# EAGLE board sega (EAGLE 7.7.0)
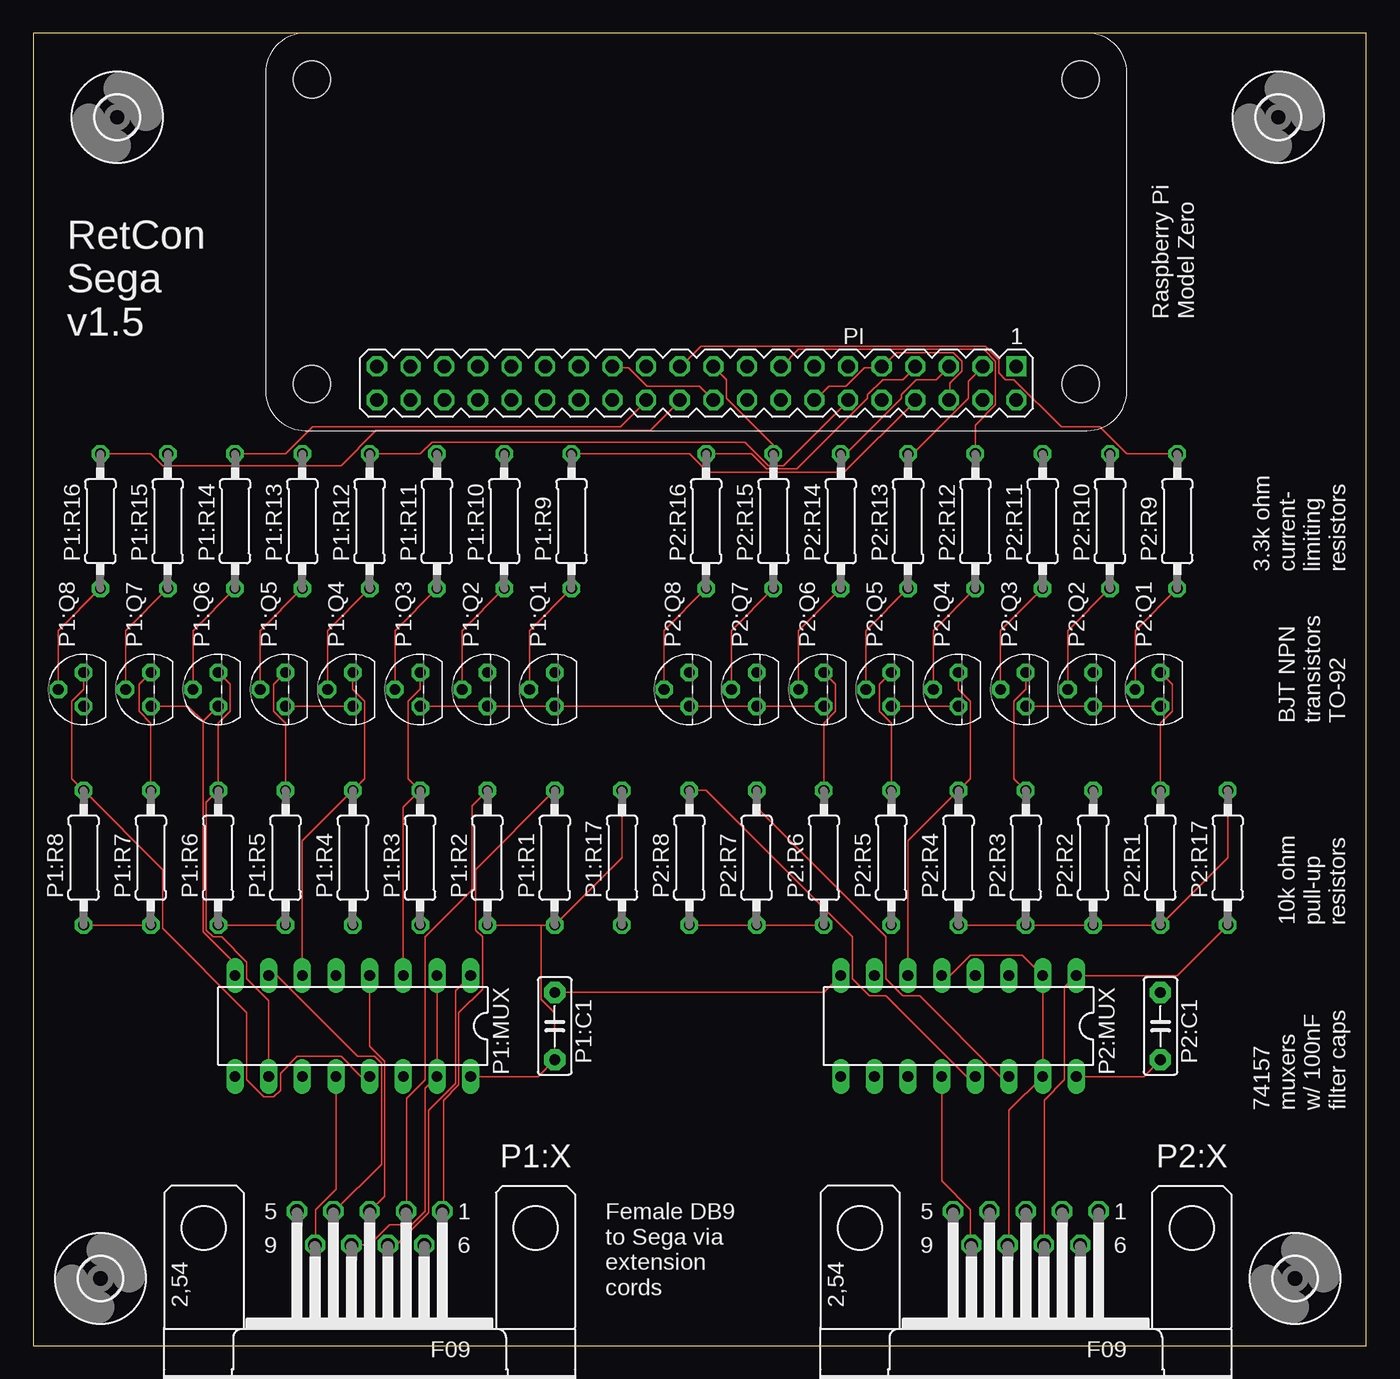
[diagram p0: board, top side]
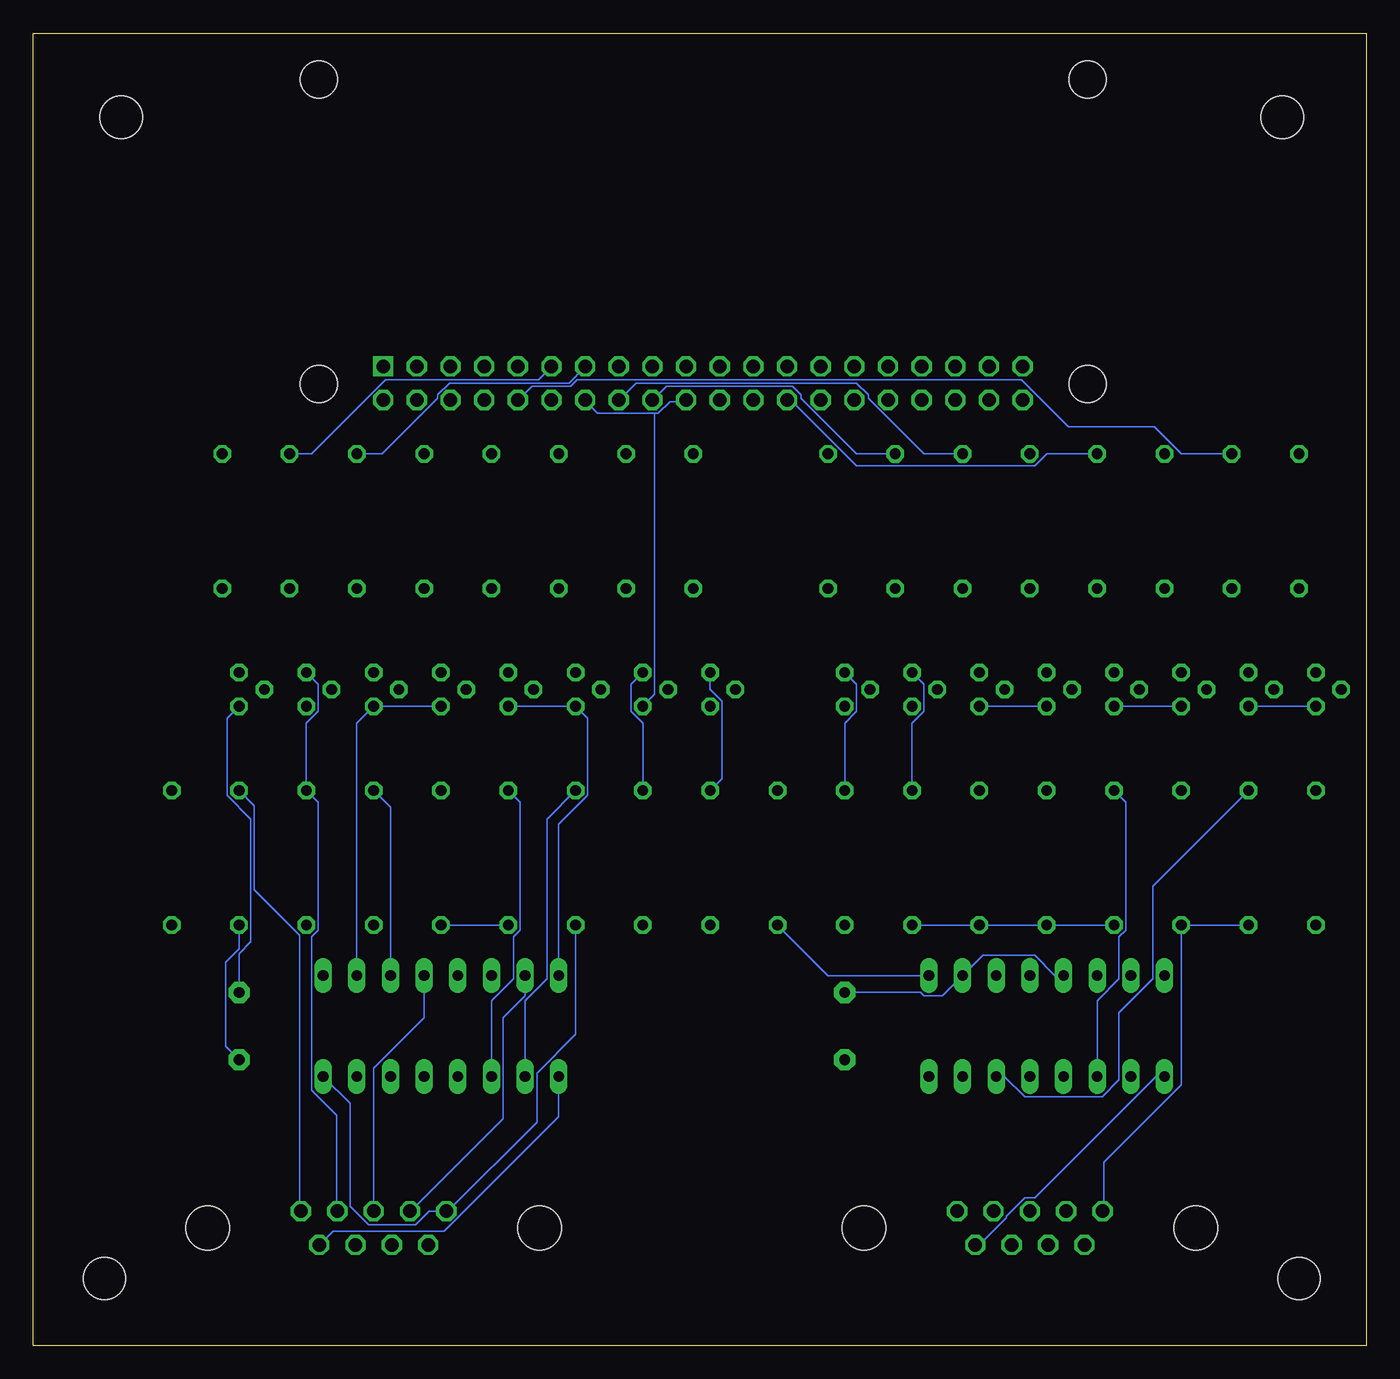
[diagram p1: board, bottom side, seen from below]

Size 100.64 x 99.05 mm. Coordinates in mm from the lower left corner, seen from the top.
Outline: 0,0 100.64,0 100.64,99.05 0,99.05 0,0
Copper layers (1*16): Top 0.035mm / dielectric 1.5mm / Bottom 0.035mm
Design rules "dirt_cheap_dirty_boards.v1": minimum track width 5mil, minimum drill 12mil, track to track 5mil, track to pad 5mil, pad to pad 5mil, via to via 5mil, smd to smd 0mil, copper to edge 10mil, drill to drill 10mil, minimum pad ring 10mil, minimum via ring 6mil, stop-mask expansion 2mil, vias tented up to drill 25mil, thermal gap 10mil

## Footprints (pad centres in the part's own frame; a part is rotated, then mirrored left to right if it is on the bottom)
C5B2.5 = drill 0.813 pad 1.6 octagon: 1 -2.54,0; 2 2.54,0
DIL16 = drill 0.813 long: 1 -8.89,-3.81; 2 -6.35,-3.81; 3 -3.81,-3.81; 4 -1.27,-3.81; 5 1.27,-3.81; 6 3.81,-3.81; 7 6.35,-3.81; 8 8.89,-3.81; 9 8.89,3.81; 10 6.35,3.81; 11 3.81,3.81; 12 1.27,3.81; 13 -1.27,3.81; 14 -3.81,3.81; 15 -6.35,3.81; 16 -8.89,3.81
TO92 = drill 0.813 octagon: 1 1.27,0; 2 0,1.905; 3 -1.27,0
0207/10 = drill 0.813 octagon: 1 -5.08,0; 2 5.08,0
F09H = drill 1.016 octagon: 1 -5.486,-1.27; 2 -2.743,-1.27; 3 0,-1.27; 4 2.743,-1.27; 5 5.486,-1.27; 6 -4.115,1.27; 7 -1.372,1.27; 8 1.372,1.27; 9 4.115,1.27 | hole 3.302: -12.522,0; 12.522,0
PIZERO_THOUGH_HOLE = drill 1.016 square: 1 8.34,25.15 | drill 1.016 octagon: 2 8.34,27.69; 3 10.88,25.15; 4 10.88,27.69; 5 13.42,25.15; 6 13.42,27.69; 7 15.96,25.15; 8 15.96,27.69; 9 18.5,25.15; 10 18.5,27.69; 11 21.04,25.15; 12 21.04,27.69; 13 23.58,25.15; 14 23.58,27.69; 15 26.12,25.15; 16 26.12,27.69; 17 28.66,25.15; 18 28.66,27.69; 19 31.2,25.15; 20 31.2,27.69; 21 33.74,25.15; 22 33.74,27.69; 23 36.28,25.15; 24 36.28,27.69; 25 38.82,25.15; 26 38.82,27.69; 27 41.36,25.15; 28 41.36,27.69; 29 43.9,25.15; 30 43.9,27.69; 31 46.44,25.15; 32 46.44,27.69; 33 48.98,25.15; 34 48.98,27.69; 35 51.52,25.15; 36 51.52,27.69; 37 54.06,25.15; 38 54.06,27.69; 39 56.6,25.15; 40 56.6,27.69 | hole 2.8: 3.5,3.5; 3.5,26.5; 61.5,26.5; 61.5,3.5
3,2 = hole 3.2: 0,0

## Placement (x,y rotation side)
P1:C1  100nF  [C5B2.5]  39.37,24.13 270 top
P1:MUX  74LS157N  [DIL16]  24.13,24.13 180 top
P1:Q1  2N3904  [TO92]  39.37,49.53 90 top
P1:Q2  2N3904  [TO92]  34.29,49.53 90 top
P1:Q3  2N3904  [TO92]  29.21,49.53 90 top
P1:Q4  2N3904  [TO92]  24.13,49.53 90 top
P1:Q5  2N3904  [TO92]  19.05,49.53 90 top
P1:Q6  2N3904  [TO92]  13.97,49.53 90 top
P1:Q7  2N3904  [TO92]  8.89,49.53 90 top
P1:Q8  2N3904  [TO92]  3.81,49.53 90 top
P1:R1  10k  [0207/10]  39.37,36.83 90 top
P1:R2  10k  [0207/10]  34.29,36.83 90 top
P1:R3  10k  [0207/10]  29.21,36.83 90 top
P1:R4  10k  [0207/10]  24.13,36.83 90 top
P1:R5  10k  [0207/10]  19.05,36.83 90 top
P1:R6  10k  [0207/10]  13.97,36.83 90 top
P1:R7  10k  [0207/10]  8.89,36.83 90 top
P1:R8  10k  [0207/10]  3.81,36.83 90 top
P1:R9  3.3k  [0207/10]  40.64,62.23 90 top
P1:R10  3.3k  [0207/10]  35.56,62.23 90 top
P1:R11  3.3k  [0207/10]  30.48,62.23 90 top
P1:R12  3.3k  [0207/10]  25.4,62.23 90 top
P1:R13  3.3k  [0207/10]  20.32,62.23 90 top
P1:R14  3.3k  [0207/10]  15.24,62.23 90 top
P1:R15  3.3k  [0207/10]  10.16,62.23 90 top
P1:R16  3.3k  [0207/10]  5.08,62.23 90 top
P1:R17  10k  [0207/10]  44.45,36.83 90 top
P1:X  -  [F09H]  25.4,8.89 180 top
P2:C1  100nF  [C5B2.5]  85.09,24.13 270 top
P2:MUX  74LS157N  [DIL16]  69.85,24.13 180 top
P2:Q1  2N3904  [TO92]  85.09,49.53 90 top
P2:Q2  2N3904  [TO92]  80.01,49.53 90 top
P2:Q3  2N3904  [TO92]  74.93,49.53 90 top
P2:Q4  2N3904  [TO92]  69.85,49.53 90 top
P2:Q5  2N3904  [TO92]  64.77,49.53 90 top
P2:Q6  2N3904  [TO92]  59.69,49.53 90 top
P2:Q7  2N3904  [TO92]  54.61,49.53 90 top
P2:Q8  2N3904  [TO92]  49.53,49.53 90 top
P2:R1  10k  [0207/10]  85.09,36.83 90 top
P2:R2  10k  [0207/10]  80.01,36.83 90 top
P2:R3  10k  [0207/10]  74.93,36.83 90 top
P2:R4  10k  [0207/10]  69.85,36.83 90 top
P2:R5  10k  [0207/10]  64.77,36.83 90 top
P2:R6  10k  [0207/10]  59.69,36.83 90 top
P2:R7  10k  [0207/10]  54.61,36.83 90 top
P2:R8  10k  [0207/10]  49.53,36.83 90 top
P2:R9  3.3k  [0207/10]  86.36,62.23 90 top
P2:R10  3.3k  [0207/10]  81.28,62.23 90 top
P2:R11  3.3k  [0207/10]  76.2,62.23 90 top
P2:R12  3.3k  [0207/10]  71.12,62.23 90 top
P2:R13  3.3k  [0207/10]  66.04,62.23 90 top
P2:R14  3.3k  [0207/10]  60.96,62.23 90 top
P2:R15  3.3k  [0207/10]  55.88,62.23 90 top
P2:R16  3.3k  [0207/10]  50.8,62.23 90 top
P2:R17  10k  [0207/10]  90.17,36.83 90 top
P2:X  -  [F09H]  74.93,8.89 180 top
PI  PIZERO_THROUGH_HOLE  [PIZERO_THOUGH_HOLE]  82.55,99.06 180 top
U$1  [3,2]  93.98,92.71 0 top
U$2  [3,2]  6.35,92.71 0 top
U$3  [3,2]  95.25,5.08 0 top
U$4  [3,2]  5.08,5.08 0 top

## Library data of the parts
P1:C1 P2:C1 = capacitor-wima
P1:MUX P2:MUX = 74xx-us
P1:Q1-P1:Q8 P2:Q1-P2:Q8 = transistor-npn
P1:R1-P1:R17 P2:R1-P2:R17 = resistor
P1:X P2:X = con-subd; OC_FARNELL: unknown; OC_NEWARK: unknown
PI = pizero
U$1-U$4 = holes

## Nets
GND: P1:C1.1 P1:MUX.2 P1:MUX.5 P1:MUX.8 P1:MUX.15 P1:Q1.3 P1:Q2.3 P1:Q3.3 P1:Q4.3 P1:Q5.3 P1:Q6.3 P1:Q7.3 P1:Q8.3 P1:X.8 P2:C1.1 P2:MUX.2 P2:MUX.5 P2:MUX.8 P2:MUX.15 P2:Q1.3 P2:Q2.3 P2:Q3.3 P2:Q4.3 P2:Q5.3 P2:Q6.3 P2:Q7.3 P2:Q8.3 P2:X.8 PI.6 PI.9 PI.14 PI.20 PI.25
N$1: P2:R10.2 PI.11
N$3: P2:R11.2 PI.13
N$4: P2:R13.2 PI.3
N$5: P2:R14.2 PI.5
N$6: P2:R16.2 PI.7
N$7: P2:R12.2 PI.15
N$8: P2:R15.2 PI.19
N$9: P2:R9.2 PI.21
N$10: P1:R9.2 PI.8
N$11: P1:R15.2 PI.10
N$12: P1:R12.2 PI.12
N$13: P1:R11.2 PI.16
N$14: P1:R10.2 PI.18
N$15: P1:R16.2 PI.22
N$16: P1:R14.2 PI.24
N$17: P1:R13.2 PI.26
P1:A: P1:MUX.11 P1:Q5.1 P1:R5.2
P1:A|B: P1:MUX.9 P1:X.6
P1:B: P1:MUX.10 P1:Q6.1 P1:R6.2
P1:C: P1:MUX.13 P1:Q8.1 P1:R8.2
P1:D: P1:Q2.1 P1:R2.2 P1:X.2
P1:G|L: P1:MUX.4 P1:X.3
P1:G|R: P1:MUX.7 P1:X.4
P1:L: P1:MUX.3 P1:Q3.1 P1:R3.2
P1:N$2: P1:Q1.2 P1:R9.1
P1:N$9: P1:Q2.2 P1:R10.1
P1:N$10: P1:Q3.2 P1:R11.1
P1:N$11: P1:Q4.2 P1:R12.1
P1:N$12: P1:Q5.2 P1:R13.1
P1:N$13: P1:Q6.2 P1:R14.1
P1:N$14: P1:Q7.2 P1:R15.1
P1:N$15: P1:Q8.2 P1:R16.1
P1:R: P1:MUX.6 P1:Q4.1 P1:R4.2
P1:S: P1:MUX.14 P1:Q7.1 P1:R7.2
P1:SEL: P1:MUX.1 P1:R17.1 P1:X.7
P1:S|C: P1:MUX.12 P1:X.9
P1:U: P1:Q1.1 P1:R1.2 P1:X.1
P1:VCC: P1:C1.2 P1:MUX.16 P1:R1.1 P1:R2.1 P1:R3.1 P1:R4.1 P1:R5.1 P1:R6.1 P1:R7.1 P1:R8.1 P1:R17.2 P1:X.5
P2:A: P2:MUX.11 P2:Q5.1 P2:R5.2
P2:A|B: P2:MUX.9 P2:X.6
P2:B: P2:MUX.10 P2:Q6.1 P2:R6.2
P2:C: P2:MUX.13 P2:Q8.1 P2:R8.2
P2:D: P2:Q2.1 P2:R2.2 P2:X.2
P2:G|L: P2:MUX.4 P2:X.3
P2:G|R: P2:MUX.7 P2:X.4
P2:L: P2:MUX.3 P2:Q3.1 P2:R3.2
P2:N$2: P2:Q1.2 P2:R9.1
P2:N$9: P2:Q2.2 P2:R10.1
P2:N$10: P2:Q3.2 P2:R11.1
P2:N$11: P2:Q4.2 P2:R12.1
P2:N$12: P2:Q5.2 P2:R13.1
P2:N$13: P2:Q6.2 P2:R14.1
P2:N$14: P2:Q7.2 P2:R15.1
P2:N$15: P2:Q8.2 P2:R16.1
P2:R: P2:MUX.6 P2:Q4.1 P2:R4.2
P2:S: P2:MUX.14 P2:Q7.1 P2:R7.2
P2:SEL: P2:MUX.1 P2:R17.1 P2:X.7
P2:S|C: P2:MUX.12 P2:X.9
P2:U: P2:Q1.1 P2:R1.2 P2:X.1
P2:VCC: P2:C1.2 P2:MUX.16 P2:R1.1 P2:R2.1 P2:R3.1 P2:R4.1 P2:R5.1 P2:R6.1 P2:R7.1 P2:R8.1 P2:R17.2 P2:X.5

## Tracks (layer width: path | path; a pad name or v marks a point on that pad's centre or on a via)
GND
  Top 0.127: P2:MUX.5 69.22,27.94 70.74,29.46 74.68,29.46 P2:MUX.2 P2:MUX.15 73.66,17.78 73.66,7.62 P2:X.8 | P2:Q3.3 P2:Q2.3 P2:Q1.3 | P1:Q3.3 P1:Q2.3 P1:Q1.3 P2:Q8.3 P2:Q7.3 P2:Q6.3 | P1:Q4.3 P1:Q5.3 | P1:MUX.8 15.24,28.83 12.83,31.24 12.83,47.12 | P1:Q6.3 12.83,47.12 | P1:Q7.3 11.68,48.26 12.83,47.12 | P1:MUX.2 P1:MUX.15 29.59,19.43 29.59,10.16 28.57,9.14 26.92,9.14 25.4,7.62 P1:X.8 | PI.25 43.81,73.79 44.96,73.79 46.35,72.39 50.29,72.39 51.31,71.37 PI.20 | PI.14 59.05,71.37 60.07,72.39 61.34,72.39 62.74,73.79 64.01,73.79 PI.9 64.14,73.91 65.15,74.93 69.47,74.93 70.1,74.3 70.1,73.53 69.22,72.64 69.22,71.37 PI.6 | P2:Q4.3 P2:Q5.3 | P1:C1.1 59.69,26.67 P2:MUX.8
  Bottom 0.127: P2:C1.1 85.09,29.59 84.2,30.48 84.2,39.75 85.98,41.53 85.98,47.37 P2:Q1.3 | P2:MUX.2 76.2,46.99 P2:Q3.3 P2:Q4.3 | P1:Q7.3 P1:Q8.3 | P1:Q6.3 P1:Q5.3 | P1:Q4.3 P1:Q3.3 | P1:MUX.5 23.5,27.94 25.02,29.46 28.96,29.46 P1:MUX.2 32,26.42 33.4,26.42 33.66,26.67 P1:C1.1 | 53.72,70.36 58.04,70.36 58.93,71.25 PI.14 | 53.72,70.36 53.47,70.36 52.58,71.25 51.44,71.25 PI.20 | P2:MUX.8 60.96,39.37 58.8,41.53 58.8,47.37 P2:Q6.3 P2:Q5.3 | 53.72,70.36 53.72,49.15 P2:Q7.3
N$1
  Bottom 0.127: P2:R10.2 79.63,67.31 74.04,72.9 62.48,72.9 61.59,73.79 PI.11
N$3
  Bottom 0.127: P2:R11.2 74.3,67.31 70.1,71.5 70.1,71.75 69.22,72.64 60.2,72.64 59.05,73.79 PI.13
N$4
  Top 0.127: P2:R13.2 66.42,67.31 70.61,71.5 70.61,72.77 71.63,73.79 PI.3
N$5
  Top 0.127: P2:R14.2 61.34,67.31 65.53,71.5 65.53,71.75 66.67,72.9 68.2,72.9 69.09,73.79 PI.5
N$6
  Top 0.127: P2:R16.2 54.23,67.31 55.37,66.17 57.66,66.17 62.99,71.5 62.99,71.75 64.14,72.9 65.66,72.9 66.55,73.79 PI.7
N$7
  Top 0.127: P2:R12.2 71.12,69.47 72.64,70.99 72.64,74.3 71.75,75.18 57.78,75.18 56.52,73.91 PI.15
N$8
  Top 0.127: P2:R15.2 55.88,67.94 52.32,71.5 52.32,72.9 51.44,73.79 PI.19
N$9
  Top 0.127: P2:R9.2 82.55,67.31 80.52,69.34 77.6,69.34 74.04,72.9 73.41,72.9 72.9,73.41 72.9,74.42 71.88,75.44 50.42,75.44 48.9,73.91 PI.21
N$10
  Top 0.127: P1:R9.2 49.53,67.31 50.93,65.91 61.21,65.91 66.55,71.25 PI.8
N$11
  Bottom 0.127: P1:R15.2 13.97,67.31 16,69.34 22.48,69.34 26.04,72.9 59.56,72.9 60.07,72.39 62.99,72.39 64.01,71.37 PI.10
N$12
  Top 0.127: P1:R12.2 29.21,67.31 30.1,68.2 53.72,68.2 55.5,66.42 56.64,66.42 61.47,71.25 PI.12
N$13
  Bottom 0.127: P1:R11.2 33.4,67.31 37.59,71.5 37.59,71.75 38.48,72.64 55.12,72.64 56.39,71.37 PI.16
N$14
  Bottom 0.127: P1:R10.2 38.48,67.31 42.67,71.5 42.67,71.75 43.31,72.39 52.83,72.39 53.85,71.37 PI.18
N$15
  Top 0.127: P1:R16.2 8.89,67.31 9.78,66.42 23.24,66.42 25.91,69.09 46.61,69.09 48.77,71.25 PI.22
N$16
  Top 0.127: P1:R14.2 19.05,67.31 21.08,69.34 44.32,69.34 46.23,71.25 PI.24
N$17
  Bottom 0.127: P1:R13.2 24.13,67.31 25.02,66.42 38.48,66.42 43.31,71.25 43.69,71.25 PI.26
P1:A
  Top 0.127: P1:R5.2 19.05,46.99 18.16,47.88 18.16,49.91 P1:Q5.1
  Bottom 0.127: P1:MUX.11 20.32,26.04 18.67,27.69 18.67,30.86 18.16,31.37 18.16,41.02 P1:R5.2
P1:A|B
  Bottom 0.127: P1:MUX.9 15.88,20.32 25.02,11.18 25.78,11.18 27.18,9.78 27.18,9.65 29.21,7.62 P1:X.6
P1:B
  Top 0.127: P1:Q6.1 14.86,49.91 14.86,47.88 13.97,46.99 P1:R6.2 13.08,41.02 13.08,31.37 13.59,30.86 14.22,30.86 16.13,28.96 16.13,27.69 17.78,26.04 P1:MUX.10
P1:C
  Top 0.127: P1:MUX.13 24.77,20.32 23.24,21.84 19.94,21.84 18.67,20.57 18.67,19.3 18.16,18.8 17.4,18.8 16.13,20.07 16.13,25.15 9.78,31.5 9.78,35.94 P1:R8.2 2.92,42.8 2.92,48.64 3.81,49.53 P1:Q8.1
P1:D
  Top 0.127: P1:R2.2 33.15,40.77 33.15,34.42 29.59,30.86 29.59,20.07 28.19,18.67 28.19,10.16 P1:X.2
  Bottom 0.127: P1:R2.2 34.29,46.99 33.4,47.88 33.4,49.91 P1:Q2.1
P1:G|L
  Top 0.127: P1:MUX.4 25.4,22.61 26.54,21.46 26.54,11.3 P1:X.3
P1:G|R
  Top 0.127: P1:MUX.7 18.41,27.94 24.51,21.84 25.78,21.84 26.29,21.34 26.29,13.72 22.73,10.16 P1:X.4
P1:L
  Top 0.127: P1:MUX.3 27.94,40.64 P1:R3.2 28.32,42.8 28.32,48.64 29.21,49.53 P1:Q3.1
P1:N$2
  Top 0.127: P1:Q1.2 37.47,53.98 P1:R9.1
P1:N$9
  Top 0.127: P1:Q2.2 32.38,53.98 P1:R10.1
P1:N$10
  Top 0.127: P1:Q3.2 27.3,53.98 P1:R11.1
P1:N$11
  Top 0.127: P1:Q4.2 22.23,53.98 P1:R12.1
P1:N$12
  Top 0.127: P1:Q5.2 17.14,53.98 P1:R13.1
P1:N$13
  Top 0.127: P1:Q6.2 12.06,53.98 P1:R14.1
P1:N$14
  Top 0.127: P1:Q7.2 6.99,53.98 P1:R15.1
P1:N$15
  Top 0.127: P1:Q8.2 1.91,53.98 P1:R16.1
P1:R
  Top 0.127: P1:MUX.6 20.32,38.1 P1:R4.2 25.02,42.8 25.02,48.64 24.13,49.53 P1:Q4.1
P1:S
  Top 0.127: P1:R7.2 8.89,46.99 8,47.88 8,49.91 P1:Q7.1
  Bottom 0.127: P1:MUX.14 27.3,20.32 25.78,18.8 19.94,18.8 18.67,20.07 18.67,25.15 16.13,27.69 16.13,34.67 P1:R7.2
P1:SEL
  Top 0.127: P1:X.7 27.43,7.62 29.84,10.03 29.84,17.78 31.88,19.81 31.88,26.8 P1:MUX.1
  Bottom 0.127: P1:MUX.1 40.64,27.94 P1:R17.1
P1:S|C
  Top 0.127: P1:MUX.12 22.86,11.81 21.34,10.29 21.34,7.62 P1:X.9
P1:U
  Top 0.127: P1:R1.2 33.4,35.94 33.4,31.37 33.91,30.86 33.91,26.92 32.13,25.15 32.13,19.68 30.99,18.54 30.99,10.16 P1:X.1
  Bottom 0.127: P1:R1.2 39.37,46.99 38.48,47.88 38.48,49.91 P1:Q1.1
P1:VCC
  Top 0.127: P1:MUX.16 38.1,20.32 P1:C1.2 39.37,25.15 38.35,26.16 38.35,31.75 | 38.35,31.75 P1:R1.1 44.45,36.83 P1:R17.2 | 38.35,31.75 P1:R2.1 | P1:R7.1 P1:R8.1 | P1:R5.1 P1:R6.1
  Bottom 0.127: P1:R5.1 P1:R4.1 P1:R3.1 P1:R2.1 | P1:X.5 19.81,10.16 19.81,13.84 13.97,19.68 P1:R6.1 P1:R7.1
P2:A
  Top 0.127: P2:R5.2 64.77,46.99 63.88,47.88 63.88,49.91 P2:Q5.1
  Bottom 0.127: P2:MUX.11 66.04,26.04 64.39,27.69 64.39,30.86 63.88,31.37 63.88,41.02 P2:R5.2
P2:A|B
  Bottom 0.127: P2:MUX.9 60.96,17.27 69.6,8.64 77.98,8.64 78.99,7.62 P2:X.6
P2:B
  Top 0.127: P2:R6.2 59.69,46.99 60.58,47.88 60.58,49.91 P2:Q6.1
  Bottom 0.127: P2:MUX.10 63.5,26.04 61.85,27.69 61.85,39.75 P2:R6.2
P2:C
  Top 0.127: P2:MUX.13 70.48,20.32 64.39,26.42 63.12,26.42 61.85,27.69 61.85,30.86 50.8,41.91 P2:R8.2
  Bottom 0.127: P2:Q8.1 49.53,49.53 48.64,48.64 48.64,42.8 P2:R8.2
P2:D
  Bottom 0.127: P2:Q2.1 79.12,49.91 79.12,47.88 80.01,46.99 P2:R2.2 79.12,41.02 79.12,31.37 79.63,30.86 79.63,19.3 77.72,17.4 77.72,10.16 P2:X.2
P2:G|L
  Bottom 0.127: P2:MUX.4 71.12,24.77 74.93,20.95 P2:X.3
P2:G|R
  Bottom 0.127: P2:MUX.7 63.5,26.42 65.15,24.77 65.15,17.14 72.14,10.16 P2:X.4
P2:L
  Top 0.127: P2:Q3.1 74.93,49.53 74.04,48.64 74.04,42.8 P2:R3.2
  Bottom 0.127: P2:MUX.3 73.66,40.64 P2:R3.2
P2:N$2
  Top 0.127: P2:Q1.2 83.19,53.98 P2:R9.1
P2:N$9
  Top 0.127: P2:Q2.2 78.11,53.98 P2:R10.1
P2:N$10
  Top 0.127: P2:Q3.2 73.03,53.98 P2:R11.1
P2:N$11
  Top 0.127: P2:Q4.2 67.94,53.98 P2:R12.1
P2:N$12
  Top 0.127: P2:Q5.2 62.87,53.98 P2:R13.1
P2:N$13
  Top 0.127: P2:Q6.2 57.78,53.98 P2:R14.1
P2:N$14
  Top 0.127: P2:Q7.2 52.7,53.98 P2:R15.1
P2:N$15
  Top 0.127: P2:Q8.2 47.62,53.98 P2:R16.1
P2:R
  Top 0.127: P2:MUX.6 66.04,38.1 P2:R4.2 70.74,42.8 70.74,48.64 69.85,49.53 P2:Q4.1
P2:S
  Top 0.127: P2:MUX.14 73.03,20.32 66.93,26.42 65.66,26.42 64.39,27.69 64.39,30.86 54.61,40.64 P2:R7.2
  Bottom 0.127: P2:R7.2 54.61,46.99 55.5,47.88 55.5,49.91 P2:Q7.1
P2:SEL
  Top 0.127: P2:R17.1 86.36,27.94 P2:MUX.1 77.85,27.05 77.85,20.07 76.33,18.54 76.33,7.62 P2:X.7
P2:S|C
  Top 0.127: P2:MUX.12 68.58,12.45 70.74,10.29 70.74,7.62 P2:X.9
P2:U
  Top 0.127: P2:R1.2 85.09,46.99 85.98,47.88 85.98,49.91 P2:Q1.1
  Bottom 0.127: P2:R1.2 83.95,40.77 83.95,34.42 80.52,30.99 80.52,10.16 P2:X.1
P2:VCC
  Top 0.127: P2:R4.1 P2:R3.1 P2:R2.1 P2:R1.1 90.17,36.83 P2:R17.2 | P2:R8.1 P2:R7.1 P2:R6.1 | P2:MUX.16 83.82,20.32 P2:C1.2
  Bottom 0.127: P2:R4.1 P2:R5.1 | P2:MUX.16 76.71,18.29 76.71,10.54 75.31,9.14 71.75,9.14 70.74,10.16 P2:X.5 69.34,10.16 62.61,16.89 62.61,20.57 59.69,23.5 P2:R6.1 | P2:R1.1 85.09,29.97 86.11,28.96 86.11,22.61 P2:C1.2

## Text on the board
tNames: Raspberry Pi / Model Zero | RetCon / Sega / v1.5 | 3.3k ohm / current- / limiting / resistors | BJT NPN / transistors / TO-92 | 10k ohm / pull-up / resistors | 74157 / muxers / w/ 100nF / filter caps | Female DB9 / to Sega via / extension / cords